# Altium PCB IRN.PcbDoc
Units mm, origin at the board's own origin, x right, y up, seen from the top; angles counter-clockwise.
Board outline 81 x 61 mm, 2 copper layers (Top Layer, Bottom Layer), stack 1.571 mm thick; 51 components, 18 nets, 104 pads, 2 vias.
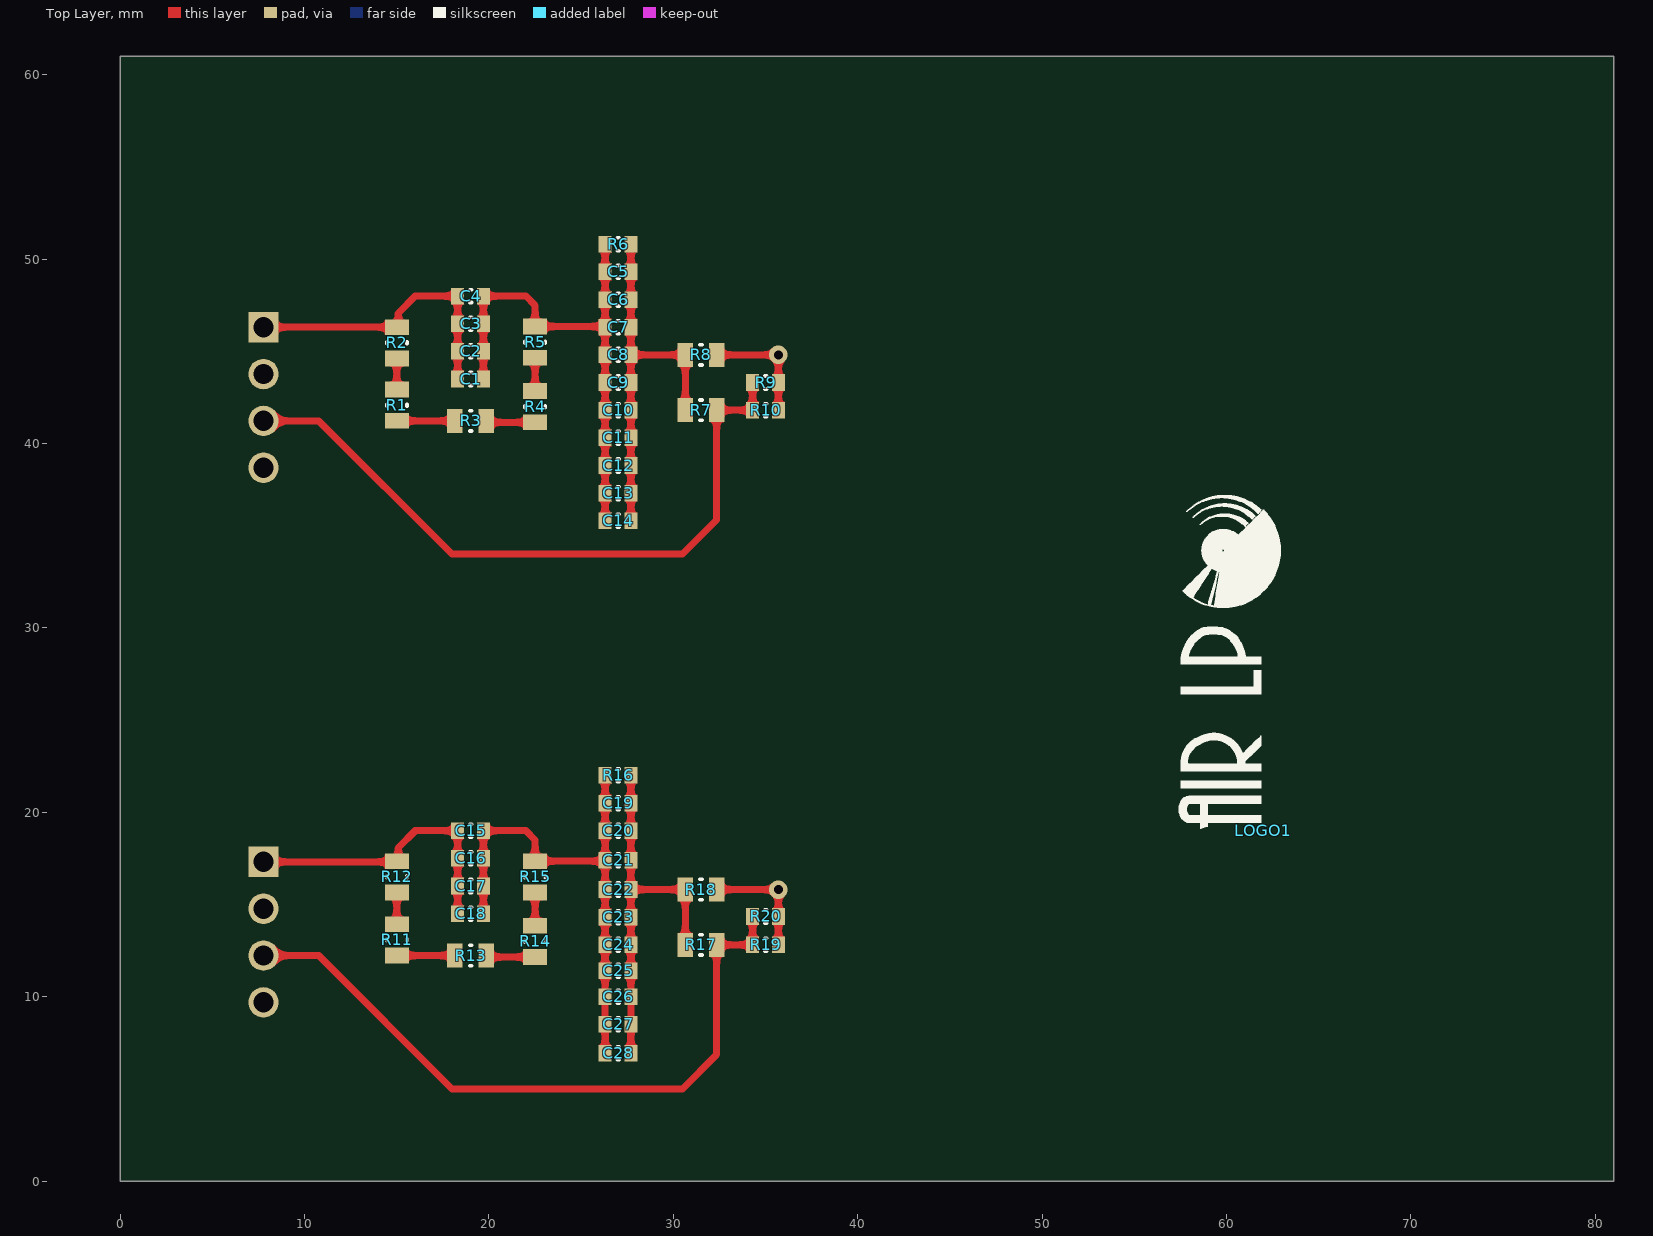
[diagram p0: Top Layer view]
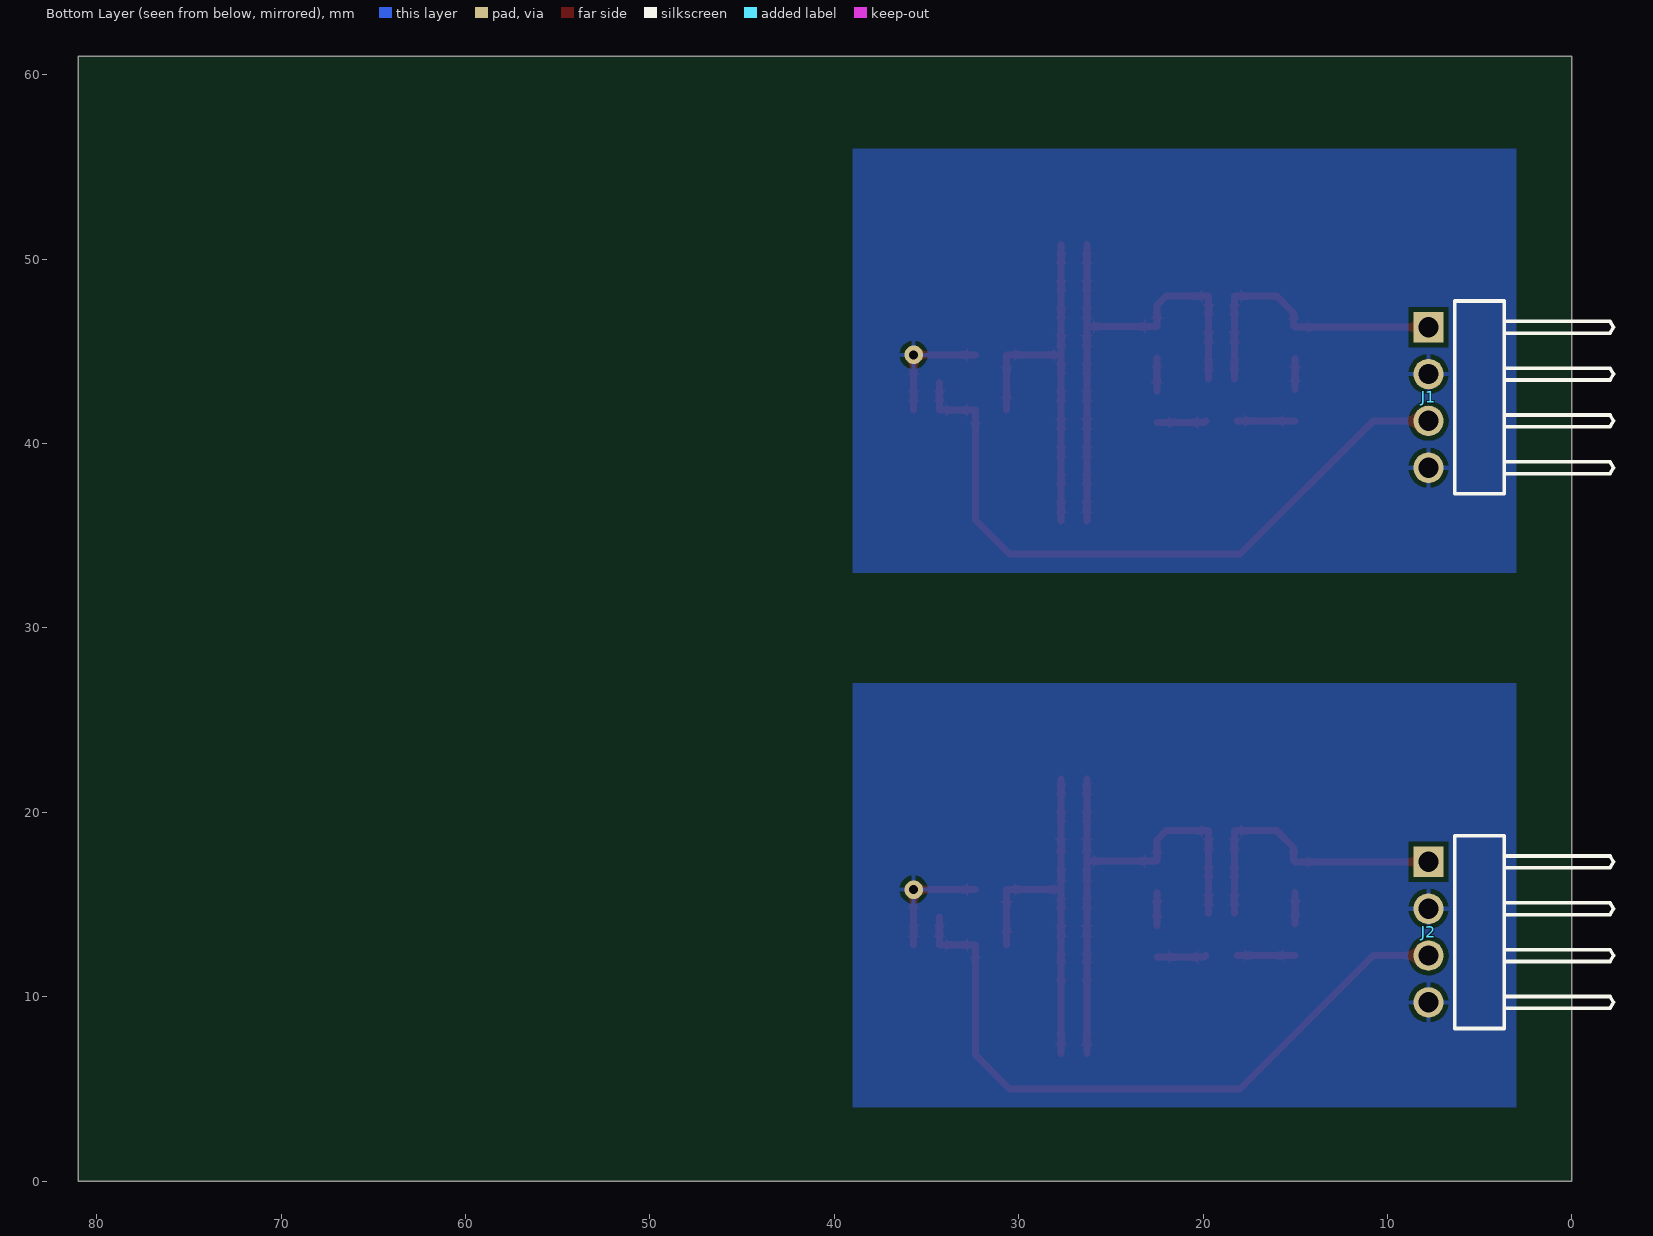
[diagram p1: Bottom Layer view, seen from below]

## Layer stack, top to bottom
Top Solder: solder mask 0.0102, Solder Resist, Dk 3.5
Top Layer: signal copper 0.0356
Dielectric 1: dielectric 1.5, FR-4, Dk 4.8
Bottom Layer: signal copper 0.0356
Bottom Solder: solder mask 0.0102, Solder Resist, Dk 3.5

## Board outline
0,0 81,0 81,61 0,61

## Design rules (kind name [scope] priority, off if disabled: settings)
Clearance [All] p1: gap=0.254 ignorepadtopadclearanceinfootprint=FALSE except(0: Arc-Hole Track-Hole SMDPad-Hole THPad-Hole Via-Hole Fill-Hole Poly-Hole Region-Hole Text-Hole)
PolygonConnect [All] p1: connectstyle=Relief reliefconductorwidth=0.254 reliefentries=4 polygonreliefangle="90 Angle" airgapwidth=0.254
RoutingVias [All] p1: holewidth=1 width=0.5 viastyle="Through Hole" minholewidth=0.7 minwidth=0.3 maxholewidth=1 maxwidth=0.5
SilkToSolderMaskClearance [IsPad] p1: minsilkscreentomaskgap=0.15 clearancetoexposedcopper=TRUE
SolderMaskExpansion [All] p1: expansion=0.102
Width [All] p1: maxlimit=1 minlimit=0.254 preferedwidth=0.254
29 further rules are at their usual default settings.

## Components (designator, comment, footprint, x,y, rotation, side; value= is the part's Value field where it differs from the comment)
C1 "CAP0603" CAPC0603(1608)100_L 19,43.5 r180 top value=3.3nF
C2 "CAP0603" CAPC0603(1608)100_L 19,45 r180 top value=100pF
C3 "CAP0603" CAPC0603(1608)100_L 19,46.5 r180 top value=100pF
C4 "CAP0603" CAPC0603(1608)100_L 19,48 r180 top value=100pF
C5 "CAP0603" CAPC0603(1608)100_L 27,49.31 r180 top value=100pF
C6 "CAP0603" CAPC0603(1608)100_L 27,47.81 r180 top value=100pF
C7 "CAP0603" CAPC0603(1608)100_L 27,46.31 r180 top value=100pF
C8 "CAP0603" CAPC0603(1608)100_L 27,44.81 r180 top value=100pF
C9 "CAP0603" CAPC0603(1608)100_L 27,43.31 r180 top value=100pF
C10 "CAP0603" CAPC0603(1608)100_L 27,41.81 r180 top value=100pF
C11 "CAP0603" CAPC0603(1608)100_L 27,40.31 r180 top value=100pF
C12 "CAP0603" CAPC0603(1608)100_L 27,38.81 r180 top value=100pF
C13 "CAP0603" CAPC0603(1608)100_L 27,37.31 r180 top value=100pF
C14 "CAP0603" CAPC0603(1608)100_L 27,35.81 r180 top value=100pF
C15 "CAP0603" CAPC0603(1608)100_L 19,19 r180 top value=3.3nF
C16 "CAP0603" CAPC0603(1608)100_L 19,17.5 r180 top value=100pF
C17 "CAP0603" CAPC0603(1608)100_L 19,16 r180 top value=100pF
C18 "CAP0603" CAPC0603(1608)100_L 19,14.5 r180 top value=100pF
C19 "CAP0603" CAPC0603(1608)100_L 27,20.5 r180 top value=100pF
C20 "CAP0603" CAPC0603(1608)100_L 27,19 r180 top value=100pF
C21 "CAP0603" CAPC0603(1608)100_L 27,17.393 r180 top value=100pF
C22 "CAP0603" CAPC0603(1608)100_L 27,15.81 r180 top value=100pF
C23 "CAP0603" CAPC0603(1608)100_L 27,14.31 r180 top value=100pF
C24 "CAP0603" CAPC0603(1608)100_L 27,12.81 r180 top value=100pF
C25 "CAP0603" CAPC0603(1608)100_L 27,11.4 r180 top value=100pF
C26 "CAP0603" CAPC0603(1608)100_L 27,10 r180 top value=100pF
C27 "CAP0603" CAPC0603(1608)100_L 27,8.5 r180 top value=100pF
C28 "CAP0603" CAPC0603(1608)100_L 27,6.93 r180 top value=100pF
J1 "61300411021" 61300411021 5,42.5 r90 bottom
J2 "61300411021" 61300411021 5,13.5 r90 bottom
LOGO1 "LOGO-AIRLP" LOGO-AIR-LP 62,19 r90 top
R1 "RES0805" RESC0805(2012)_L 15,42.08 r90 top value=220K
R2 "RES0805" RESC0805(2012)_L 15,45.46 r90 top value=220K
R3 "RES0805" RESC0805(2012)_L 19,41.23 r0 top value=220K
R4 "RES0805" RESC0805(2012)_L 22.5,42 r90 top value=220K
R5 "RES0805" RESC0805(2012)_L 22.5,45.5 r90 top value=3K
R6 "RES0603" RESC0603(1608)_L 27,50.81 r0 top value=75K
R7 "RES0805" RESC0805(2012)_L 31.5,41.81 r0 top value=560R
R8 "RES0805" RESC0805(2012)_L 31.5,44.81 r0 top value=604R
R9 "RES0603" RESC0603(1608)_L 35,43.31 r0 top value=82R
R10 "RES0603" RESC0603(1608)_L 35,41.81 r0 top value=82R
R11 "RES0805" RESC0805(2012)_L 15,13.08 r90 top value=220K
R12 "RES0805" RESC0805(2012)_L 15,16.5 r90 top value=220K
R13 "RES0805" RESC0805(2012)_L 19,12.23 r0 top value=220K
R14 "RES0805" RESC0805(2012)_L 22.5,13 r90 top value=220K
R15 "RES0805" RESC0805(2012)_L 22.5,16.5 r90 top value=3K
R16 "RES0603" RESC0603(1608)_L 27,22 r0 top value=75K
R17 "RES0805" RESC0805(2012)_L 31.5,12.81 r0 top value=560R
R18 "RES0805" RESC0805(2012)_L 31.5,15.81 r0 top value=604R
R19 "RES0603" RESC0603(1608)_L 35,12.81 r0 top value=82R
R20 "RES0603" RESC0603(1608)_L 35,14.35 r0 top value=82R

## Footprints (in the part's own frame and the unit in brackets; to place one, negate y for a bottom-side part, rotate by r counter-clockwise, add the part's x,y. Pads: shape width x height; smd on the part's side, far side on the other; paste and mask are expansions set on the pad)
61300411021 [mm] "Pin Header, pitch 2.54 mm, THT, Angled, single row, 4p"
  rect 1.65x1.65 hole 1.1: 1(3.81,2.77)
  round 1.65 hole 1.1: 2(1.27,2.77) 3(-1.27,2.77) 4(-3.81,2.77)
  silkscreen extent -5.23,-7.27 5.23,1.35, body extent -5.08,-7.27 5.08,3.09, height 2.58
CAPC0603(1608)100_L [mm]
  rect 0.7x0.9 smd: 1(-0.7,0) 2(0.7,0)
  silkscreen extent -0.05,-0.35 0.05,0.35, body extent -0.87,-0.47 0.88,0.48, height 1
LOGO-AIR-LP [mm]
  silkscreen extent 0.1,-0.94 18.19,4.55
RESC0603(1608)_L [mm]
  rect 0.7x0.9 smd: 1(-0.7,0) 2(0.7,0)
  silkscreen extent -0.05,-0.35 0.05,0.35, body extent -0.85,-0.47 0.85,0.47, height 0.6
RESC0805(2012)_L [mm]
  rect 0.85x1.3 smd: 1(-0.85,0) 2(0.85,0)
  silkscreen extent -0.05,-0.55 0.05,0.55, body extent -1.1,-0.67 1.1,0.68, height 0.7

## Part data
C1 C2 C3 C4 C5 C6 C7 C8 C9 C10 C11 C12 C13 C14 C15 C16 C17 C18 C19 C20 C21 C22 C23 C24 C25 C26 C27 C28: library part CMP-1590-00005-1, "0603 (1608 Metric) Chip Capacitor", Case-EIA=0603, Case-Metric=1608, Tolerance=1%, PackageReference=CAPC0603(1608)100
  C1 C15: Farnell=2904728
  C2 C3 C4 C5 C6 C7 C8 C9 C10 C11 C12 C13 C14 C16 C17 C18 C19 C20 C21 C22 C23 C24 C25 C26 C27 C28: Farnell=2332598
J1 J2: "THT Angled Pin Header WR-PHD, Pitch 2.54 mm, Single Row, 4 pins", Contact Resistance="20 mOhm", Operating Temperature="-40 to 105 degC", Rated Current="3 A", Withstanding Voltage="500 VAC", Working Voltage="250 VAC", ComponentLink1Description=Manufacturer, ComponentLink1URL=http://www.we-online.de, ComponentLink2Description=Datasheet, ComponentLink2URL=https://katalog.we-online.de/em/datasheet/6130xx11021.pdf, Gender=Male, Mounting Technology=THT, Orientation=Angled, Packaging=Bag, Part Number=61300411021, Pin Number=4, Pitch="2.54 mm", Published Date="August 2018", Publisher="Wurth Elektronik", Row Number=Single
LOGO1: "LOGO AIR LP"
R1 R2 R3 R4 R5 R7 R8 R11 R12 R13 R14 R15 R17 R18: library part CMP-1591-00002-1, "0805 (2012 Metric) Chip Resistor", Case-EIA=0805, Case-Metric=2012, Tolerance=0.1%, PackageReference=RESC0805(2012)
  R1 R2 R3 R4 R11 R12 R13 R14: Farnell=1577690
  R5 R15: Farnell=1670234
  R7 R17: Farnell=1577655
  R8 R18: Farnell=1810482
R6 R9 R10 R16 R19 R20: library part CMP-1591-00001-1, "0603 (1608 Metric) Chip Resistor", Case-EIA=0603, Case-Metric=1608, Tolerance=0.1%, PackageReference=RESC0603(1608)
  R6 R16: Farnell=1670201
  R9 R10 R19 R20: Farnell=1577592

## Via types
v1: diameter 1, hole 0.5, Top Layer to Bottom Layer, 2 vias

## Nets (pads, with @x,y where several pads share a name; then routed paths per layer and width w, separated by ;. In a path a pad name is that pad's centre, name@x,y a point inside that pad or via, vN(x,y) a via of type N, cw(c..) or ccw(c..) an arc to the next point about the centre after c; other vN are vias at no path point)
GNDL: J1.2 J1.4 R8.2 R9.2 R10.2 | length 6.3
  Top Layer w0.381: R8.2 v1(35.7,44.81) R9.2 R10.2
GNDR: J2.2 J2.4 R18.2 R19.2 R20.2 | length 6.3
  Top Layer w0.381: R18.2 v1(35.7,15.81) 35.7,14.31 R19.2
NetC1_1: C1.1 C2.1 C3.1 C4.1 C5.2 C6.2 C7.2 C8.2 C9.2 C10.2 C11.2 C12.2 C13.2 C14.2 R5.2 R6.1 | length 27.5
  Top Layer w0.381: C1.1 C2.1 C3.1 C4.1 22,48 22.5,47.5 R5.2 26.26,46.35 C7.2 ; C14.2 C5.2 R6.1
NetC5_1: C5.1 C6.1 C7.1 C8.1 C9.1 C10.1 C11.1 C12.1 C13.1 C14.1 R6.2 R7.1 R8.1 | length 21
  Top Layer w0.381: C14.1 C8.1 ; R6.2 C8.1 ; R7.1 R8.1 C8.1
NetC15_1: C15.1 C16.1 C17.1 C18.1 C19.2 C20.2 C21.2 C22.2 C23.2 C24.2 C25.2 C26.2 C27.2 C28.2 R15.2 R16.1 | length 27.5
  Top Layer w0.381: C18.1 C17.1 C16.1 C15.1 22,19 22.5,18.5 R15.2 26.26,17.35 C21.2@26.3,17.31 ; C28.2 26.3,7.93 ; 26.3,7.81 26.3,8.12 C27.2 26.3,9 26.3,9.5 C26.2 26.3,10.5 26.3,11 26.3,11.5 26.3,12.5 C24.2 26.3,14.35 C22.2 26.3,17.35 C20.2 26.3,20.31 R16.1@26.3,21.81
NetC19_1: C19.1 C20.1 C21.1 C22.1 C23.1 C24.1 C25.1 C26.1 C27.1 C28.1 R16.2 R17.1 R18.1 | length 21
  Top Layer w0.381: C28.1 27.7,7.93 ; 27.7,7.81 27.7,8.12 C27.1 27.7,9 27.7,9.5 C26.1 27.7,10.5 27.7,11 27.7,11.5 27.7,12.5 C24.1 27.7,14.35 C22.1 ; R16.2@27.7,21.81 C19.1 C20.1 C21.1 C22.1 ; R17.1 R18.1 C22.1
NetR1_1: R1.1 R3.1 | length 3.2
  Top Layer w0.381: R1.1 R3.1
NetR1_2: R1.2 R2.1 | length 1.7
  Top Layer w0.381: R1.2 R2.1
NetR3_2: R3.2 R4.1 | length 2.7
  Top Layer w0.381: R3.2 19.93,41.15 R4.1
NetR4_2: R4.2 R5.1 | length 1.8
  Top Layer w0.381: R4.2 R5.1
NetR11_1: R11.1 R13.1 | length 3.2
  Top Layer w0.381: R11.1 R13.1
NetR11_2: R11.2 R12.1 | length 1.7
  Top Layer w0.381: R11.2 R12.1
NetR13_2: R13.2 R14.1 | length 2.7
  Top Layer w0.381: R13.2 19.93,12.15 R14.1
NetR14_2: R14.2 R15.1 | length 1.8
  Top Layer w0.381: R14.2 R15.1
VINL: C1.2 C2.2 C3.2 C4.2 J1.1 R2.2 | length 16.1
  Top Layer w0.381: J1.1 R2.2 15.083,46.393 15.083,47.083 16,48 C4.2 C3.2 C2.2 C1.2
VINR: C15.2 C16.2 C17.2 C18.2 J2.1 R12.2 | length 16.1
  Top Layer w0.381: J2.1 15,17.31 15.083,17.393 15.083,18.083 16,19 C15.2 C16.2 C17.2 C18.2
VOUTL: J1.3 R7.2 R9.1 R10.1 | length 37.8
  Top Layer w0.381: J1.3 10.77,41.23 18,34 30.5,34 32.35,35.85 R7.2 R10.1 R9.1
VOUTR: J2.3 R17.2 R19.1 R20.1 | length 37.8
  Top Layer w0.381: J2.3 10.77,12.23 18,5 30.5,5 32.35,6.85 R17.2 R19.1 R20.1@34.3,14.31

## Polygon pours and split planes (outlines as drawn)
GNDL on Bottom Layer (solid, pour order 2): 39,33 39,56 3,56 3,33
GNDR on Bottom Layer (solid, pour order 0): 39,4 39,27 3,27 3,4

## Silkscreen, mask and mechanical layers (free items; w line width, h text height)
Mechanical 1:
  the board outline again, w0.2